# Altium PCB PCB2.PcbDoc
Units mil, origin at the board's own origin, x right, y up, seen from the top; angles counter-clockwise.
Board outline 2050 x 3450 mil, 2 copper layers (Top Layer, Bottom Layer); 28 components, 22 nets, 92 pads, 0 vias.
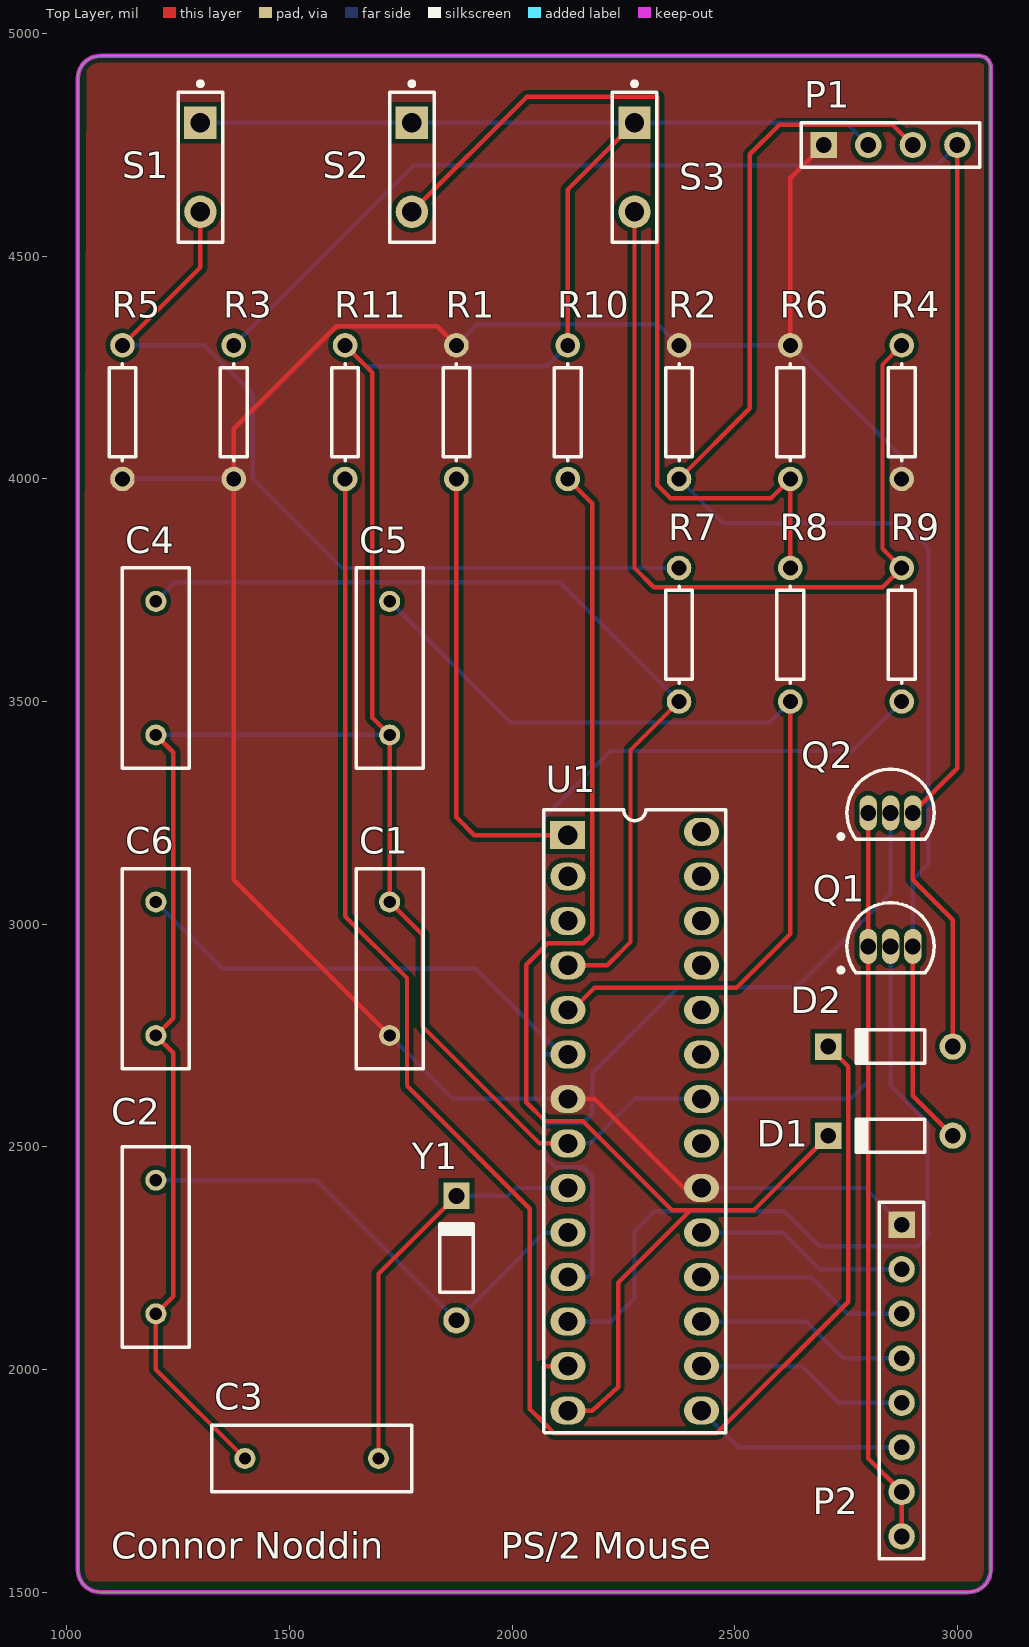
[diagram p0: Top Layer view]
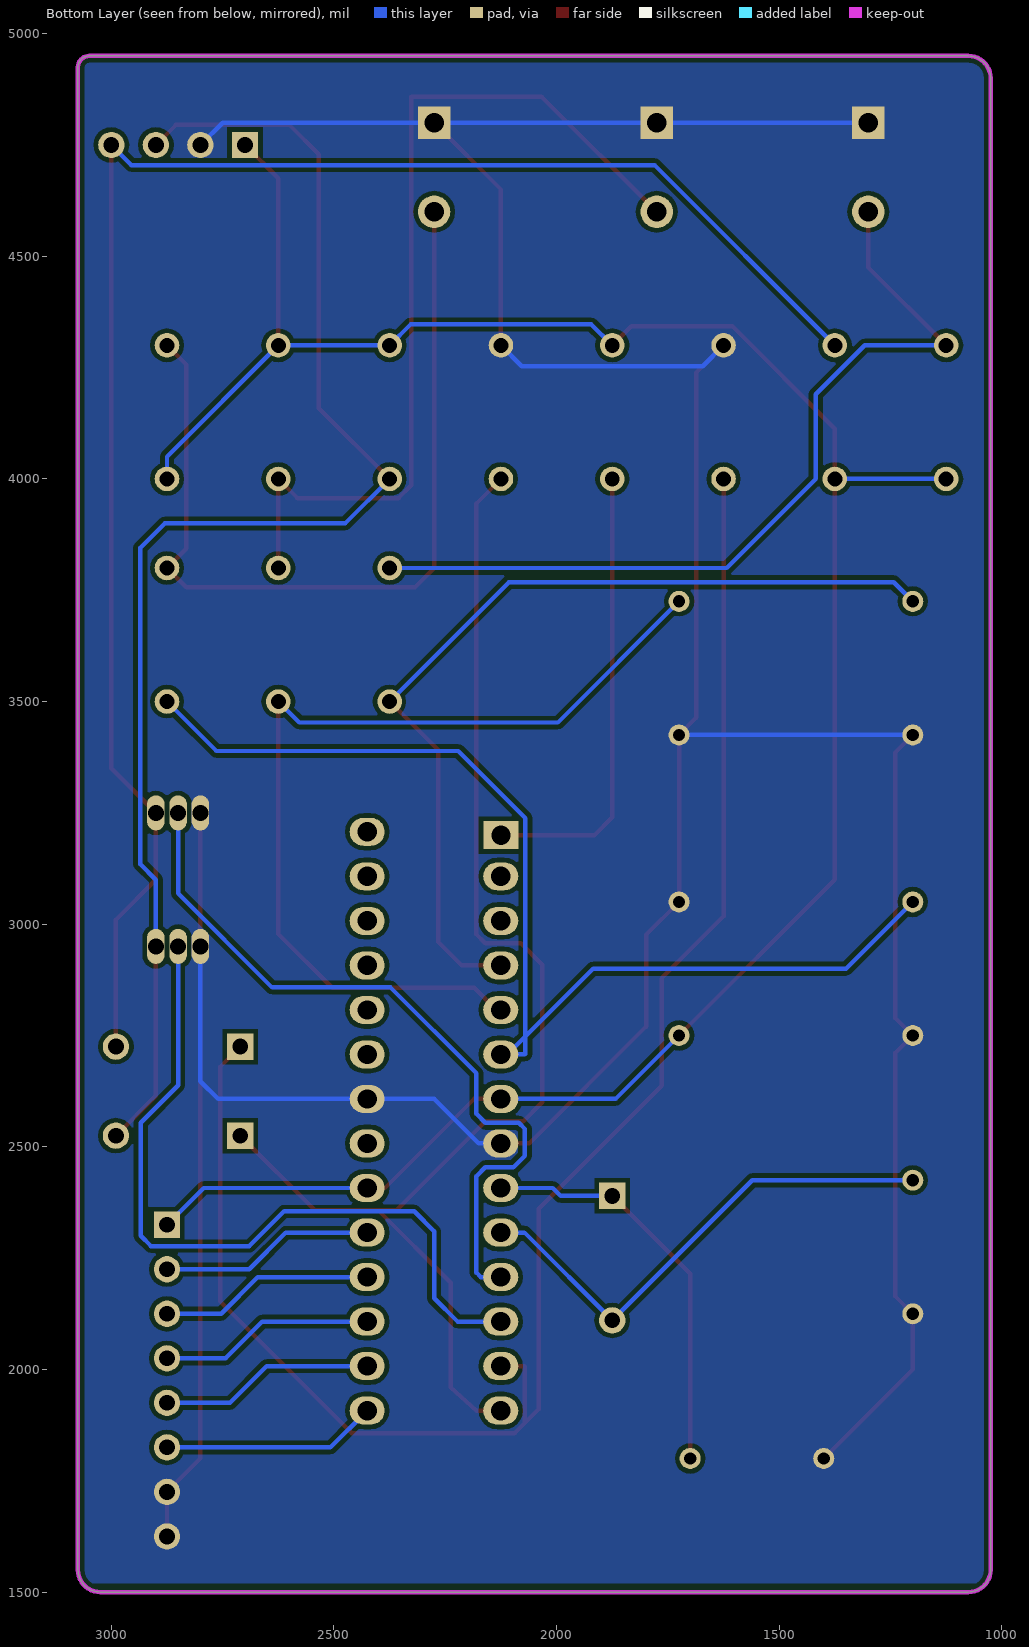
[diagram p1: Bottom Layer view, seen from below]

## Layer stack, top to bottom
Top Solder: solder mask 0.4, Solder Resist, Dk 3.5
Top Layer: signal copper 1.4
Dielectric 1: dielectric 12.6, FR-4, Dk 4.8
Bottom Layer: signal copper 1.4
Bottom Solder: solder mask 0.4, Solder Resist, Dk 3.5

## Board outline
1075,1500 cw(c1075,1550) 1025,1550 1025,4900 cw(c1075,4900) 1075,4950 3050,4950 cw(c3050,4925) 3075,4925 3075,1550 cw(c3025,1550) 3025,1500

## Design rules (kind name [scope] priority, off if disabled: settings)
Clearance [All] p1: gap=10
MinimumSolderMaskSliver [All] p1 off: minsoldermaskwidth=10
PlaneConnect [All] p1: planeconnectstyle=Direct reliefexpansion=20 reliefentries=4 reliefconductorwidth=10 reliefairgap=10
PolygonConnect [All] p1: connectstyle=Direct reliefconductorwidth=10 reliefentries=4 polygonreliefangle="90 Angle" airgapwidth=10
RoutingVias [All] p1: holewidth=28 width=50 viastyle="Through Hole" minholewidth=28 minwidth=50 maxholewidth=28 maxwidth=50
SilkToBoardRegionClearance [All] p1 off:
SilkToSilkClearance [All] p1 off: silktosilkclearance=10
SilkToSolderMaskClearance [IsPad] p1 off: minsilkscreentomaskgap=10 clearancetoexposedcopper=TRUE
SolderMaskExpansion [All] p1: expansion=4
Width [All] p1: maxlimit=10 minlimit=10 preferedwidth=10
25 further rules are at their usual default settings.

## Components (designator, comment, footprint, x,y, rotation, side; value= is the part's Value field where it differs from the comment)
C1 "Cap" RAD-0.3 1725,2900 r90 top
C2 "Cap" RAD-0.3 1200,2275 r90 top
C3 "Cap" RAD-0.3 1550,1800 r180 top
C4 "Cap" RAD-0.3 1200,3575 r90 top
C5 "Cap" RAD-0.3 1725,3575 r90 top
C6 "Cap" RAD-0.3 1200,2900 r90 top
D1 "Diode 1N914" DO-35 2850,2525 r180 top
D2 "Diode 1N914" DO-35 2850,2725 r180 top
P1 "Header 4" HDR1X4 2700,4750 r0 top
P2 "Header 8" HDR1X8 2875,2325 r270 top
Q1 "2N3904" TO-92A 2850,2950 r270 top
Q2 "2N3904" TO-92A 2850,3250 r270 top
R1 "Res1" AXIAL-0.3 1875,4150 r90 top
R2 "Res1" AXIAL-0.3 2375,4150 r90 top
R3 "Res1" AXIAL-0.3 1375,4150 r270 top
R4 "Res1" AXIAL-0.3 2875,4150 r270 top
R5 "Res1" AXIAL-0.3 1125,4150 r270 top
R6 "Res1" AXIAL-0.3 2625,4150 r90 top
R7 "Res1" AXIAL-0.3 2375,3650 r270 top
R8 "Res1" AXIAL-0.3 2625,3650 r270 top
R9 "Res1" AXIAL-0.3 2875,3650 r270 top
R10 "Res1" AXIAL-0.3 2125,4150 r270 top
R11 "Res1" AXIAL-0.3 1625,4150 r90 top
S1 "SW-PB" SPST-2 1300,4700 r270 top
S2 "SW-PB" SPST-2 1775,4700 r270 top
S3 "SW-PB" SPST-2 2275,4700 r270 top
U1 "ATMEGA328P-PU" 27_DIP_7.62mm 2125,3200 r0 top
Y1 "XTAL" DO-35 1875,2250 r90 top

## Footprints (in the part's own frame and the unit in brackets; to place one, negate y for a bottom-side part, rotate by r counter-clockwise, add the part's x,y. Pads: shape width x height; smd on the part's side, far side on the other; paste and mask are expansions set on the pad)
27_DIP_7.62mm [mm]
  rect 2x1.6 hole 1.1: 1(0,0)
  oval 2x1.6 hole 1.1: 2(0.01,-2.35) 3(0.01,-4.89) 4(0.01,-7.43) 5(0.01,-9.97) 6(0.01,-12.51) 7(0.01,-15.05) 8(0.01,-17.59) 9(0.01,-20.13) 10(0.01,-22.67) 11(0.01,-25.21) 12(0.01,-27.75) 13(0.01,-30.29) 14(0.01,-32.83) 15(7.63,-32.83) 16(7.63,-30.29) 17(7.63,-27.75) 18(7.63,-25.21) 19(7.63,-22.67) 20(7.63,-20.13) 21(7.63,-17.59) 22(7.63,-15.05) 23(7.63,-12.51) 24(7.63,-9.97) 25(7.63,-7.43) 26(7.63,-4.89) 27(7.63,-2.35) 28(7.63,0.19)
  silkscreen extent -1.35,-34.1 9.02,1.46, body extent -0.23,-34.26 7.65,1.68, height 4.65
AXIAL-0.3 [mm] "Axial Device, Thru-Hole; 2 Leads; 0.3 in Pin Spacing"
  round 1.4 hole 0.85: 1(-3.81,0) 2(3.81,0)
  silkscreen extent -2.77,-0.76 2.77,0.76
DO-35 [mm] "Diode, Axial; Body 3.8 x 1.9 mm (LxDia. max), Lead Dia. 0.53 mm (max)"
  round 1.5 hole 0.9: 1(-3.55,0)
  rect 1.5x1.5 hole 0.9: 2(3.55,0)
  silkscreen extent -1.95,-0.95 2.05,0.95
HDR1X4 [mm] "Connector; Header; 4 Position"
  rect 1.5x1.5 hole 0.9: 1(0,0)
  round 1.5 hole 0.9: 2(2.54,0) 3(5.08,0) 4(7.62,0)
  silkscreen extent -1.27,-1.27 8.89,1.27
HDR1X8 [mm] "Connector; Header; 8 Position"
  rect 1.5x1.5 hole 0.9: 1(0,0)
  round 1.5 hole 0.9: 2(2.54,0) 3(5.08,0) 4(7.62,0) 5(10.16,0) 6(12.7,0) 7(15.24,0) 8(17.78,0)
  silkscreen extent -1.27,-1.27 19.05,1.27
RAD-0.3 [mm] "Radial Cap, Thru-Hole; 2 Leads; 0.3 in Pin Spacing"
  round 1.2 hole 0.7: 1(-3.81,0) 2(3.81,0)
  silkscreen extent -5.71,-1.91 5.71,1.91
SPST-2 [mm] "Switch; 2 Leads"
  rect 1.85x1.85 hole 1.1: 1(-2.54,0)
  round 1.85 hole 1.1: 2(2.54,0)
  silkscreen extent -4.89,-1.27 4.28,1.27
TO-92A [mm] "TO, Flat Index; 3 In-Line, Axial Leads; Body Dia. 4.5mm; Leads 0.51 x 0.48 mm (max)"
  oval 2x1 hole 0.9: 1(0,-1.27) 2(0,0) 3(0,1.27)
  silkscreen extent -2.48,-2.95 1.5,2.48, body extent -2.5,-2.5 1.5,2.5, height 6.86

## Part data
C1 C2 C3 C4 C5 C6: "Capacitor"
D1 D2: "High Conductance Fast Diode"
P1: "Header, 4-Pin"
P2: "Header, 8-Pin"
Q1 Q2: "NPN General Purpose Amplifier"
R1 R2 R3 R4 R5 R6 R7 R8 R9 R10 R11: "Resistor"
S1 S2 S3: "Switch"
U1: "ATMEGA328P-PU; 8 bit Microcontroller AVR 20MHz 1; 32kb Flash; 2kb RAM; I2C SPI 2"
Y1: "Crystal Oscillator"

## Nets (pads, with @x,y where several pads share a name; then routed paths per layer and width w, separated by ;. In a path a pad name is that pad's centre, name@x,y a point inside that pad or via, vN(x,y) a via of type N, cw(c..) or ccw(c..) an arc to the next point about the centre after c; other vN are vias at no path point)
GND: C1.2 C2.1 C3.2 C4.1 C5.1 C6.1 P1.2 P2.7 P2.8 Q1.1 Q2.1 R10.1 R11.2 S1.1 S2.1 S3.1 U1.8 U1.22 | length 9647.6
  Top Layer w10: C4.1 1239,3386 1239,2789 C6.1 1239,2711 1239,2164 C2.1 1200,2000 C3.2 ; R11.2 1686,4239 1686,3464 C5.1 C1.2 1799,2976 1799,2770 2061.52,2507.48 U1.8 ; R10.1 2125,4650 S3.1 ; Q2.1 Q1.1 2800,1800 P2.7 P2.8
  Bottom Layer w10: C4.1 C5.1 ; S1.1 S2.1 S3.1 2750,4800 P1.2 ; R11.2 1672,4253 2078,4253 R10.1 ; U1.8 2175,2507.48 2275,2607.48 U1.22 2760,2607.48 2800,2647.48 Q1.1
MISO: P2.3 U1.18 | length 483.8
  Bottom Layer w10: U1.18 2671,2207.48 2753.48,2125 P2.3
MOSI: P2.4 U1.17 | length 483.8
  Bottom Layer w10: U1.17 2661,2107.48 2743.48,2025 P2.4
MOTION: P2.6 U1.15 | length 483.8
  Bottom Layer w10: U1.15 2507.87,1825 P2.6
NetC2_2: C2.2 U1.10 Y1.1 | length 1137.5
  Bottom Layer w10: C2.2 1560.24,2425 Y1.1 2072.24,2307.48 U1.10
NetC3_1: C3.1 U1.9 Y1.2 | length 920
  Top Layer w10: C3.1 1700,2214.76 Y1.2
  Bottom Layer w10: Y1.2 1991,2389.76 2008.72,2407.48 U1.9
NetC4_2: C4.2 R7.2 U1.4 | length 2051.3
  Top Layer w10: U1.4 2213.48,2907.48 2266,2960 2266,3391 R7.2
  Bottom Layer w10: C4.2 1243,3768 2107,3768 R7.2
NetC5_2: C5.2 R8.2 U1.5 | length 2124.4
  Top Layer w10: U1.5 2135.48,2807.48 2185,2857 2504,2857 2625,2978 R8.2
  Bottom Layer w10: C5.2 1997,3453 2578,3453 R8.2
NetC6_2: C6.2 R9.2 U1.6 | length 2551.2
  Bottom Layer w10: C6.2 1350,2900 1918,2900 2070,2748 ; U1.6 U1.6@2110.52,2707.48 ; R9.2 2764,3389 2221,3389 2070,3238 2070,2748 ; 2070,2748 2070,2708.48 2071,2707.48 U1.6@2110.52,2707.48 ; 2070,2748 U1.6@2110.52,2707.48
NetD1_1: D1.1 P1.3 Q1.3 R2.1 | length 3202.7
  Top Layer w10: R2.1 2534,4159 2534,4729 2600,4795 2855,4795 P1.3 ; Q1.3 2900,2614.76 D1.1
  Bottom Layer w10: R2.1 2475,3900 2880,3900 2935,3845 2935,3135 2900,3100 Q1.3
NetD1_2: D1.2 R10.2 U1.14 | length 2976.4
  Top Layer w10: R10.2 2180,3945 2180,2977 2160,2957 2080,2957 2032,2909 2032,2600 2075,2557 2160,2557 2360,2357 2400,2357 ; U1.14 2180,1907.48 2238,1960 2238,2195 2400,2357 ; D1.2 2542.24,2357 2400,2357
NetD2_1: D2.1 P1.4 Q2.3 R3.1 | length 3915
  Top Layer w10: D2.1 2989.76,3010.24 2900,3100 Q2.3 3000,3350 P1.4
  Bottom Layer w10: R3.1 1780,4705 2955,4705 P1.4
NetD2_2: D2.2 R11.1 U1.13 | length 3893.9
  Top Layer w10: R11.1 1625,3018 1764,2879 1764,2637 2040,2361 2040,1911 2071,1880 ; U1.13 2071,2007.48 2071,1880 ; D2.2 2755,2680.24 2755,2152 2460,1857 2094,1857 2071,1880
NetQ1_2: Q1.2 U1.12 | length 1725.6
  Bottom Layer w10: U1.12 2222.48,2107.48 2275,2160 2275,2310 2320,2355 2612,2355 2690,2277 2911,2277 2934,2300 2934,2554 2850,2638 Q1.2
NetQ2_2: Q2.2 U1.11 | length 1695.7
  Bottom Layer w10: U1.11 2170,2207.48 2180,2217.48 2180,2434 2160,2454 2097,2454 2071,2480 2071,2540 2085,2554 2160,2554 2180,2574 2180,2665 2373,2858 2639,2858 2850,3069 Q2.2
NetR1_1: R1.1 U1.1 | length 1026.6
  Top Layer w10: R1.1 1875,3240 1915,3200 U1.1
NetR4_1: R4.1 R9.1 S3.2 | length 1971.2
  Top Layer w10: S3.2 2275,3800 2318,3757 2832,3757 R9.1 2832,3843 2832,4257 R4.1
NetR5_1: R5.1 R7.1 S1.2 | length 1940.9
  Top Layer w10: R5.1 1300,4475 S1.2
  Bottom Layer w10: R5.1 1308,4300 1418,4190 1418,4000 1618,3800 R7.1
NetR6_1: R6.1 R8.1 S2.2 | length 2058.9
  Top Layer w10: S2.2 2033,4858 2326.42,4858 2326.42,3985.58 2355,3957 2582,3957 R6.1 R8.1
SPICLK: P2.2 U1.19 | length 483.8
  Bottom Layer w10: U1.19 2608,2307.48 2690.48,2225 P2.2
SS: P2.5 U1.16 | length 483.8
  Bottom Layer w10: U1.16 2651,2007.48 2733.48,1925 P2.5
VCC: C1.1 P1.1 P2.1 R1.2 R2.2 R3.2 R4.2 R5.2 R6.2 U1.7 U1.20 | length 5370.7
  Top Layer w10: C1.1 1375,3100 R3.2 1375,4113 1605,4343 1832,4343 R1.2 ; U1.7 2185.48,2607.48 2385.48,2407.48 U1.20 ; R6.2 2625,4675 P1.1
  Bottom Layer w10: R5.2 R3.2 ; C1.1 1867.52,2607.48 U1.7 ; R1.2 1922,4347 2328,4347 R2.2 R6.2 2875,4050 R4.2 ; U1.20 2792.52,2407.48 P2.1
pads on no net: U1.2 U1.3 U1.21 U1.23 U1.24 U1.25 U1.26 U1.27 U1.28

## Polygon pours and split planes (outlines as drawn)
VCC on Top Layer "Top Layer +5V" (solid, pour order 2): 1044.56,4939.67 1050.68,4945.79 3063.89,4945.79 3063.89,1517.57 3060.66,1514.34 3050.22,1524.78 1031.32,1524.78
GND on Bottom Layer "Bottom Layer GND" (solid, pour order 4): 1039.34,4935.66 3060.66,4935.66 3068.02,4943.02 3064.67,4939.67 3064.67,1519.56 1035.33,1519.56

## Keep-outs
Keep-Out Layer:
  lines w10: 1025,1550 ccw(c1075,1550) 1075,1500 1100,1500 3025,1500 ccw(c3025,1550) 3075,1550 3075,4925 ccw(c3050,4925) 3050,4950 1075,4950 ccw(c1075,4900) 1025,4900 1025,1550

## Silkscreen, mask and mechanical layers (free items; w line width, h text height)
Top Overlay:
  text "Connor Noddin" at 1100,1575 h60
  text "PS/2 Mouse" at 1975,1575 h60